# EAGLE board CT_schematic (EAGLE 7.6.0)

Size 100 x 80 mm. Coordinates in mm from the lower left corner, seen from the top.
Outline: 0,0 100,0 100,80 0,80 0,0
Copper layers (1*16): Top 0.035mm / dielectric 1.5mm / Bottom 0.035mm
Design rules "default": minimum track width 10mil, minimum drill 24mil, track to track 8mil, track to pad 8mil, pad to pad 8mil, via to via 8mil, smd to smd 8mil, copper to edge 40mil, drill to drill 8mil, minimum pad ring 10mil, minimum via ring 8mil, stop-mask expansion 4mil, vias tented up to drill 0mil, thermal gap 10mil

## Footprints (pad centres in the part's own frame; a part is rotated, then mirrored left to right if it is on the bottom)
C0603 = smd 0.8 x 0.8: 1 -0.762,0; 2 0.762,0
C0402 = smd 0.5 x 0.5: 1 -0.508,0; 2 0.508,0
C1206 = smd 1.3 x 1.6: 1 -1.524,0; 2 1.524,0
C0805 = smd 1.2 x 1.3: 1 -1.016,0; 2 1.016,0
C1210 = smd 1.2 x 2.5: 1 -1.524,0; 2 1.524,0
R0603 = smd 0.8 x 0.8: 1 -0.762,0; 2 0.762,0
EXV-9H = smd 3.505 x 1.676: 1 -2.857,0; 2 2.857,0
L0603 = smd 0.8 x 0.8: 1 -0.762,0; 2 0.762,0
PJ-037B_PACKAGE = drill 3.7 square: 1 12,0 | drill 3.2 square: 2 6,0
UFBGA176_25 = smd 0.3 x 0.3: A1 -4.55,4.55; A2 -3.9,4.55; A3 -3.25,4.55; A4 -2.6,4.55; A5 -1.95,4.55; A6 -1.3,4.55; A7 -0.65,4.55; A8 0,4.55; A9 0.65,4.55; A10 1.3,4.55; A11 1.95,4.55; A12 2.6,4.55; A13 3.25,4.55; A14 3.9,4.55; A15 4.55,4.55; B1 -4.55,3.9; B2 -3.9,3.9; B3 -3.25,3.9; B4 -2.6,3.9; B5 -1.95,3.9; B6 -1.3,3.9; B7 -0.65,3.9; B8 0,3.9; B9 0.65,3.9; B10 1.3,3.9; B11 1.95,3.9; B12 2.6,3.9; B13 3.25,3.9; B14 3.9,3.9; B15 4.55,3.9; C1 -4.55,3.25; C2 -3.9,3.25; C3 -3.25,3.25; C4 -2.6,3.25; C5 -1.95,3.25; C6 -1.3,3.25; C7 -0.65,3.25; C8 0,3.25; C9 0.65,3.25; C10 1.3,3.25; C11 1.95,3.25; C12 2.6,3.25; C13 3.25,3.25; C14 3.9,3.25; C15 4.55,3.25; D1 -4.55,2.6; D2 -3.9,2.6; D3 -3.25,2.6; D4 -2.6,2.6; D5 -1.95,2.6; D6 -1.3,2.6; D7 -0.65,2.6; D8 0,2.6; D9 0.65,2.6; D10 1.3,2.6; D11 1.95,2.6; D12 2.6,2.6; D13 3.25,2.6; D14 3.9,2.6; D15 4.55,2.6; E1 -4.55,1.95; E2 -3.9,1.95; E3 -3.25,1.95; E4 -2.6,1.95; E12 2.6,1.95; E13 3.25,1.95; E14 3.9,1.95; E15 4.55,1.95; F1 -4.55,1.3; F2 -3.9,1.3; F3 -3.25,1.3; F4 -2.6,1.3; F6 -1.3,1.3; F7 -0.65,1.3; F8 0,1.3; F9 0.65,1.3; F10 1.3,1.3; F12 2.6,1.3; F13 3.25,1.3; F14 3.9,1.3; F15 4.55,1.3; G1 -4.55,0.65; G2 -3.9,0.65; G3 -3.25,0.65; G4 -2.6,0.65; G6 -1.3,0.65; G7 -0.65,0.65; G8 0,0.65; G9 0.65,0.65; G10 1.3,0.65; G12 2.6,0.65; G13 3.25,0.65; G14 3.9,0.65; G15 4.55,0.65; H1 -4.55,0; H2 -3.9,0; H3 -3.25,0; H4 -2.6,0; H6 -1.3,0; H7 -0.65,0; H8 0,0; H9 0.65,0; H10 1.3,0; H12 2.6,0; H13 3.25,0; H14 3.9,0; H15 4.55,0; J1 -4.55,-0.65; J2 -3.9,-0.65; J3 -3.25,-0.65; J4 -2.6,-0.65; J6 -1.3,-0.65; J7 -0.65,-0.65; J8 0,-0.65; J9 0.65,-0.65; J10 1.3,-0.65; J12 2.6,-0.65; J13 3.25,-0.65; J14 3.9,-0.65; J15 4.55,-0.65; K1 -4.55,-1.3; K2 -3.9,-1.3; K3 -3.25,-1.3; K4 -2.6,-1.3; K6 -1.3,-1.3; K7 -0.65,-1.3; K8 0,-1.3; K9 0.65,-1.3; K10 1.3,-1.3; K12 2.6,-1.3; K13 3.25,-1.3; K14 3.9,-1.3; K15 4.55,-1.3; L1 -4.55,-1.95; L2 -3.9,-1.95; L3 -3.25,-1.95; L4 -2.6,-1.95; L12 2.6,-1.95; L13 3.25,-1.95; L14 3.9,-1.95; L15 4.55,-1.95; M1 -4.55,-2.6; M2 -3.9,-2.6; M3 -3.25,-2.6; M4 -2.6,-2.6; M5 -1.95,-2.6; M6 -1.3,-2.6; M7 -0.65,-2.6; M8 0,-2.6; M9 0.65,-2.6; M10 1.3,-2.6; M11 1.95,-2.6; M12 2.6,-2.6; M13 3.25,-2.6; M14 3.9,-2.6; M15 4.55,-2.6; N1 -4.55,-3.25; N2 -3.9,-3.25; N3 -3.25,-3.25; N4 -2.6,-3.25; N5 -1.95,-3.25; N6 -1.3,-3.25; N7 -0.65,-3.25; N8 0,-3.25; N9 0.65,-3.25; N10 1.3,-3.25; N11 1.95,-3.25; N12 2.6,-3.25; N13 3.25,-3.25; N14 3.9,-3.25; N15 4.55,-3.25; P1 -4.55,-3.9; P2 -3.9,-3.9; P3 -3.25,-3.9; P4 -2.6,-3.9; P5 -1.95,-3.9; P6 -1.3,-3.9; P7 -0.65,-3.9; P8 0,-3.9; P9 0.65,-3.9; P10 1.3,-3.9; P11 1.95,-3.9; P12 2.6,-3.9; P13 3.25,-3.9; P14 3.9,-3.9; P15 4.55,-3.9; R1 -4.55,-4.55; R2 -3.9,-4.55; R3 -3.25,-4.55; R4 -2.6,-4.55; R5 -1.95,-4.55; R6 -1.3,-4.55; R7 -0.65,-4.55; R8 0,-4.55; R9 0.65,-4.55; R10 1.3,-4.55; R11 1.95,-4.55; R12 2.6,-4.55; R13 3.25,-4.55; R14 3.9,-4.55; R15 4.55,-4.55
SOIC-8 = smd 1.6 x 0.6: 1 -2.7,1.905 | smd 1.55 x 0.6: 2 -2.7,0.635; 3 -2.7,-0.635; 4 -2.7,-1.905; 5 2.7,-1.905; 6 2.7,-0.635; 7 2.7,0.635; 8 2.7,1.905
RHB32_3P45X3P45 = smd 0.85 x 0.28: 1 -2.475,1.75; 2 -2.475,1.25; 3 -2.475,0.75; 4 -2.475,0.25; 5 -2.475,-0.25; 6 -2.475,-0.75; 7 -2.475,-1.25; 8 -2.475,-1.75; 17 2.475,-1.75; 18 2.475,-1.25; 19 2.475,-0.75; 20 2.475,-0.25; 21 2.475,0.25; 22 2.475,0.75; 23 2.475,1.25; 24 2.475,1.75 | smd 0.28 x 0.85: 9 -1.75,-2.475; 10 -1.25,-2.475; 11 -0.75,-2.475; 12 -0.25,-2.475; 13 0.25,-2.475; 14 0.75,-2.475; 15 1.25,-2.475; 16 1.75,-2.475; 25 1.75,2.475; 26 1.25,2.475; 27 0.75,2.475; 28 0.25,2.475; 29 -0.25,2.475; 30 -0.75,2.475; 31 -1.25,2.475; 32 -1.75,2.475 | smd 3.45 x 3.45: 33 0,0
FCI_10118193-0001LF = smd 0.4 x 1.35: 1 -1.3,2.675; 2 -0.65,2.675; 3 0,2.675; 4 0.65,2.675; 5 1.3,2.675 | smd 1.6 x 1.4: 6 -3.2,2.45; 7 3.2,2.45 | smd 1.9 x 1.9: 8 -1.2,0; 9 1.2,0 | hole 0.5: -3.3,0; 3.3,0
SOT143B = smd 1 x 0.7: 1 -0.75,-1 | smd 0.6 x 0.7: 2 0.95,-1; 3 0.95,1; 4 -0.95,1
ABS07-32.768KHZ-7-T = smd 1.1 x 2.4: 1 -2.5,0; 2 0,0
ABLS-25.000MHZ-B2F-T = smd 5.6 x 2.8: 1 -3.81,0; 2 5.69,0
ASFL1 = smd 1.7 x 1.5: 1 -1.27,-1.1; 2 1.27,-1.1; 3 1.27,1.1; 4 -1.27,1.1
WSON-8 = smd 0.3 x 0.6: 1 -0.75,0; 2 0.05,0; 3 0.85,0; 4 1.65,0; 5 1.65,3.8; 6 0.85,3.8; 7 0.05,3.8; 8 -0.75,3.8 | smd 3 x 2.6: PAD 0.45,1.9
QFN-38_UHF = smd 0.75 x 0.3: 1 -2.4,2.75; 2 -2.4,2.25; 3 -2.4,1.75; 4 -2.4,1.25; 6 -2.4,0.25; 7 -2.4,-0.25; 8 -2.4,-0.75; 9 -2.4,-1.25; 10 -2.4,-1.75; 11 -2.4,-2.25; 12 -2.4,-2.75; 20 2.4,-2.75; 21 2.4,-2.25; 22 2.4,-1.75; 23 2.4,-1.25; 24 2.4,-0.75; 25 2.4,-0.25; 26 2.4,0.25; 27 2.4,0.75; 28 2.4,1.25; 29 2.4,1.75; 30 2.4,2.25; 31 2.4,2.75 | smd 0.758 x 0.3: 5 -2.4,0.75 | smd 0.3 x 0.75: 13 -1.5,-3.4; 14 -1,-3.4; 15 -0.5,-3.4; 16 0,-3.4; 17 0.5,-3.4; 18 1,-3.4; 19 1.5,-3.4; 32 1.5,3.4; 33 1,3.4; 34 0.5,3.4; 35 0,3.4; 36 -0.5,3.4; 37 -1,3.4; 38 -1.5,3.4 | smd 3.2 x 5.2: 39 0,0
IRF8306MTRPBF = smd 0.9 x 1.85: 1 0,0; 2 0,-2.35; 6 6.4,0; 7 6.4,-2.35 | smd 0.75 x 0.75: 3 1.75,-1.175 | smd 1.45 x 0.87: 4 3.5,-0.565; 5 3.5,-1.785
SW_4-1437565-2 = smd 1.4 x 2.1: 1 -2.23,4.55; 2 -2.23,-4.55; 3 2.23,4.55; 4 2.23,-4.55
LGM67K-G1J2-24-Z = smd 0.8 x 1.4: A -2,0; C 0,0
NC7SZ125M5X = smd 1.3 x 0.7: 1 -1.3,0.95; 2 -1.3,0; 3 -1.3,-0.95; 4 1.3,-0.95; 5 1.3,0.95
DUMMY_PACKAGE_252 = drill 0.3: 1 0,-1; 2 1.5,-1

## Placement (x,y rotation side)
C1  1e-06  [C0603]  -30.48,71.12 0 top  (outside the outline)
C2  1e-07  [C0603]  -34.29,71.12 0 top  (outside the outline)
C3  1e-07  [C0603]  -38.1,71.12 0 top  (outside the outline)
C4  1e-07  [C0603]  -41.91,71.12 0 top  (outside the outline)
C5  1e-07  [C0603]  -45.72,71.12 0 top  (outside the outline)
C6  1e-07  [C0603]  -49.53,71.12 0 top  (outside the outline)
C7  1e-07  [C0603]  -53.34,71.12 0 top  (outside the outline)
C8  1e-07  [C0603]  -57.15,71.12 0 top  (outside the outline)
C9  1e-07  [C0603]  -60.96,71.12 0 top  (outside the outline)
C10  1e-07  [C0603]  -64.77,71.12 0 top  (outside the outline)
C11  1e-07  [C0603]  -68.58,71.12 0 top  (outside the outline)
C12  1e-07  [C0603]  -72.39,71.12 0 top  (outside the outline)
C13  1e-07  [C0603]  -76.2,71.12 0 top  (outside the outline)
C14  1e-07  [C0603]  -80.01,71.12 0 top  (outside the outline)
C15  1e-07  [C0603]  -15.24,76.2 0 top  (outside the outline)
C16  1e-07  [C0603]  -19.05,76.2 0 top  (outside the outline)
C17  4.7e-06  [C0603]  -15.24,71.12 0 top  (outside the outline)
C18  1e-08  [C0603]  -22.86,76.2 0 top  (outside the outline)
C19  1e-06  [C0603]  -26.67,76.2 0 top  (outside the outline)
C20  1e-07  [C0402]  -76.2,76.2 0 top  (outside the outline)
C21  1e-07  [C0402]  -80.01,76.2 0 top  (outside the outline)
C22  1e-11  [C0402]  -15.24,81.28 0 top  (outside the outline)
C23  1e-11  [C0402]  -19.05,81.28 0 top  (outside the outline)
C24  1e-11  [C0402]  -22.86,81.28 0 top  (outside the outline)
C25  1e-11  [C0402]  -26.67,81.28 0 top  (outside the outline)
C26  1e-08  [C0402]  -30.48,81.28 0 top  (outside the outline)
C27  1e-08  [C0402]  -34.29,81.28 0 top  (outside the outline)
C28  1e-07  [C0402]  -38.1,81.28 0 top  (outside the outline)
C29  2.2e-06  [C0603]  -19.05,71.12 0 top  (outside the outline)
C30  1e-07  [C0402]  -41.91,81.28 0 top  (outside the outline)
C31  1e-07  [C0402]  -45.72,81.28 0 top  (outside the outline)
C32  2.2e-06  [C0603]  -22.86,71.12 0 top  (outside the outline)
C33  1e-06  [C0603]  -30.48,76.2 0 top  (outside the outline)
C34  1e-08  [C0402]  -49.53,81.28 0 top  (outside the outline)
C35  1e-08  [C0402]  -53.34,81.28 0 top  (outside the outline)
C36  1e-05  [C1206]  -16.51,54.61 0 top  (outside the outline)
C37  1e-05  [C0805]  -46.99,54.61 0 top  (outside the outline)
C38  1e-08  [C0402]  -57.15,81.28 0 top  (outside the outline)
C39  1e-05  [C1206]  -22.86,54.61 0 top  (outside the outline)
C40  1e-05  [C0805]  -52.07,54.61 0 top  (outside the outline)
C41  1e-06  [C0603]  -34.29,76.2 0 top  (outside the outline)
C42  1e-05  [C1210]  -78.74,46.99 0 top  (outside the outline)
C43  1e-08  [C0402]  -60.96,81.28 0 top  (outside the outline)
C44  1e-05  [C1206]  -29.21,54.61 0 top  (outside the outline)
C45  1e-05  [C0805]  -57.15,54.61 0 top  (outside the outline)
C46  1e-07  [C0402]  -64.77,81.28 0 top  (outside the outline)
C47  2.2e-06  [C0603]  -26.67,71.12 0 top  (outside the outline)
C48  2.45e-08  [R0603]  -40.64,60.96 0 top  (outside the outline)
C49  2.8258362168397e-09  [R0603]  -67.31,54.61 0 top  (outside the outline)
C50  7.105e-09  [R0603]  -77.47,54.61 0 top  (outside the outline)
C51  0.0001  [EXV-9H]  -54.61,38.1 0 top  (outside the outline)
C52  0.0001  [EXV-9H]  -66.04,38.1 0 top  (outside the outline)
C53  1e-08  [C0402]  -68.58,81.28 0 top  (outside the outline)
C54  1e-08  [C0402]  -72.39,81.28 0 top  (outside the outline)
F1  240.0  [L0603]  -38.1,76.2 0 top  (outside the outline)
J1  PJ-037B  [PJ-037B_PACKAGE]  -41.91,7.62 0 top  (outside the outline)
R2  1000.0  [R0603]  -41.91,76.2 0 top  (outside the outline)
R7  4700.0  [R0603]  -45.72,76.2 0 top  (outside the outline)
R8  4700.0  [R0603]  -49.53,76.2 0 top  (outside the outline)
R9  10000.0  [R0603]  -45.72,60.96 0 top  (outside the outline)
R10  10000.0  [R0603]  -50.8,60.96 0 top  (outside the outline)
R11  10000.0  [R0603]  -55.88,60.96 0 top  (outside the outline)
R12  10000.0  [R0603]  -60.96,60.96 0 top  (outside the outline)
R13  10000.0  [R0603]  -66.04,60.96 0 top  (outside the outline)
R14  10000.0  [R0603]  -71.12,60.96 0 top  (outside the outline)
R15  10000.0  [R0603]  -76.2,60.96 0 top  (outside the outline)
R16  10000.0  [R0603]  -81.28,60.96 0 top  (outside the outline)
R17  10000.0  [R0603]  -15.24,66.04 0 top  (outside the outline)
R18  10000.0  [R0603]  -20.32,66.04 0 top  (outside the outline)
R19  10000.0  [R0603]  -25.4,66.04 0 top  (outside the outline)
R20  10000.0  [R0603]  -30.48,66.04 0 top  (outside the outline)
R21  100000.0  [R0603]  -15.24,60.96 0 top  (outside the outline)
R22  200.0  [R0603]  -53.34,76.2 0 top  (outside the outline)
R23  1000.0  [R0603]  -57.15,76.2 0 top  (outside the outline)
R24  100000.0  [R0603]  -20.32,60.96 0 top  (outside the outline)
R25  806.0  [R0603]  -60.96,76.2 0 top  (outside the outline)
R26  1000.0  [R0603]  -64.77,76.2 0 top  (outside the outline)
R27  100000.0  [R0603]  -25.4,60.96 0 top  (outside the outline)
R28  153694.38  [R0603]  -72.39,54.61 0 top  (outside the outline)
R29  100000.0  [R0603]  -30.48,60.96 0 top  (outside the outline)
R30  100000.0  [R0603]  -35.56,60.96 0 top  (outside the outline)
R31  200.0  [R0603]  -68.58,76.2 0 top  (outside the outline)
R32  1000.0  [R0603]  -72.39,76.2 0 top  (outside the outline)
R33  10000.0  [R0603]  -35.56,66.04 0 top  (outside the outline)
R34  75000.0  [R0603]  -40.64,66.04 0 top  (outside the outline)
R35  10000.0  [R0603]  -45.72,66.04 0 top  (outside the outline)
R36  10000.0  [R0603]  -50.8,66.04 0 top  (outside the outline)
R37  95300.0  [R0603]  -55.88,66.04 0 top  (outside the outline)
R38  95300.0  [R0603]  -60.96,66.04 0 top  (outside the outline)
R39  10000.0  [R0603]  -66.04,66.04 0 top  (outside the outline)
R40  10000.0  [R0603]  -71.12,66.04 0 top  (outside the outline)
R41  10000.0  [R0603]  -76.2,66.04 0 top  (outside the outline)
R42  62000.0  [R0603]  -81.28,66.04 0 top  (outside the outline)
U1  STM32F429IGH6  [UFBGA176_25]  -19.05,6.35 0 top  (outside the outline)
U2  AT25256B-SSHL-T  [SOIC-8]  -74.93,5.08 0 top  (outside the outline)
U3  AT25320B-SSHL-T  [SOIC-8]  -24.13,20.32 0 top  (outside the outline)
U4  TUSB1210BRHBR  [RHB32_3P45X3P45]  -38.1,48.26 0 top  (outside the outline)
U5  10118193-0001LF  [FCI_10118193-0001LF]  -35.56,38.1 0 top  (outside the outline)
U6  prtr5v0u2ax  [SOT143B]  -24.13,86.36 0 top  (outside the outline)
U7  ABS07-32.768KHZ-7-T  [ABS07-32.768KHZ-7-T]  -58.42,48.26 0 top  (outside the outline)
U8  ABLS-25.000MHZ-B2F-T  [ABLS-25.000MHZ-B2F-T]  -26.67,48.26 0 top  (outside the outline)
U9  ASFL1-26MHZ-NCS  [ASFL1]  -26.67,39.37 0 top  (outside the outline)
U10  LP3878SDX-ADJ/NOPB  [WSON-8]  -76.2,17.78 0 top  (outside the outline)
U11  LP3878SDX-ADJ/NOPB  [WSON-8]  -30.48,27.94 0 top  (outside the outline)
U12  LP2951ACSDX/NOPB  [WSON-8]  -68.58,27.94 0 top  (outside the outline)
U13  LP3878SDX-ADJ/NOPB  [WSON-8]  -50.8,27.94 0 top  (outside the outline)
U14  LTC2928CUHF#PBF  [QFN-38_UHF]  -44.45,38.1 0 top  (outside the outline)
U15  IRF8306MTRPbF  [IRF8306MTRPBF]  -41.91,20.32 0 top  (outside the outline)
U16  IRF8306MTRPbF  [IRF8306MTRPBF]  -57.15,20.32 0 top  (outside the outline)
U17  4-1437565-2  [SW_4-1437565-2]  -58.42,6.35 0 top  (outside the outline)
U18  Q65110A2395  [LGM67K-G1J2-24-Z]  -67.31,46.99 0 top  (outside the outline)
U19  nc7sz125m5x  [NC7SZ125M5X]  -34.29,54.61 0 top  (outside the outline)
U20  nc7sz125m5x  [NC7SZ125M5X]  -40.64,54.61 0 top  (outside the outline)
U21  Dummy  [DUMMY_PACKAGE_252]  -29.21,86.36 0 top  (outside the outline)

## Library data of the parts
C1-C54 F1 J1 R2 R7-R42 U1-U21 = circuit_tree

## Nets
CLK_CRYSTAL_U1_E1: C22.1 U1.E1 U7.1
CLK_CRYSTAL_U1_F1: C23.1 U1.F1 U7.2
CLK_CRYSTAL_U1_G1: C24.1 U1.G1 U8.1
CLK_CRYSTAL_U1_H1: C25.1 U1.H1 U8.2
CLK_U4_1: U4.1 U9.3
GND: C1.2 C2.2 C3.2 C4.2 C5.2 C6.2 C7.2 C8.2 C9.2 C10.2 C11.2 C12.2 C13.2 C14.2 C15.2 C16.2 C17.2 C18.2 C19.2 C20.2 C21.2 C22.2 C23.2 C24.2 C25.2 C26.2 C27.2 C28.2 C29.2 C30.2 C31.2 C32.2 C33.2 C34.2 C35.2 C36.2 C37.2 C38.2 C39.2 C40.2 C41.2 C42.2 C43.2 C44.2 C45.2 C46.2 C47.2 C48.2 C49.2 C50.2 C51.2 C52.2 C53.2 C54.2 J1.2 R2.2 R23.2 R26.2 R29.2 R32.2 R34.2 R37.2 R38.2 R39.2 R40.2 R41.2 U1.D5 U1.D7 U1.D8 U1.D9 U1.F2 U1.F6 U1.F7 U1.F8 U1.F9 U1.F10 U1.F12 U1.G2 U1.G6 U1.G7 U1.G8 U1.G9 U1.G10 U1.G12 U1.H6 U1.H7 U1.H8 U1.H9 U1.H10 U1.H12 U1.J6 U1.J7 U1.J8 U1.J9 U1.J10 U1.K6 U1.K7 U1.K8 U1.K9 U1.K10 U1.M1 U1.M8 U1.M9 U1.N1 U2.4 U3.4 U4.33 U5.5 U5.6 U5.7 U5.8 U5.9 U6.1 U9.2 U10.3 U10.PAD U11.3 U11.PAD U12.3 U12.4 U12.PAD U13.3 U13.PAD U14.8 U14.9 U14.10 U14.12 U14.13 U14.24 U14.25 U14.30 U14.32 U14.39 U18.C U19.1 U19.3 U20.1 U20.3 U21.1
NET_U1_C6: R9.1 U1.C6
NET_U1_D6: R10.1 U1.D6
NET_U1_F13: C21.1 U1.F13
NET_U1_J1: R7.1 U1.J1 U19.4
NET_U1_L4: R12.1 U1.L4
NET_U1_M6: R11.1 U1.M6
NET_U1_R1: C18.1 C19.1 F1.1 U1.P1 U1.R1
NET_U1_R14: U18.A
NET_U1_R15: U17.3 U17.4
NET_U2_3: R13.1 U2.3
NET_U2_7: R15.1 U2.7
NET_U3_3: R16.1 U3.3
NET_U3_7: R18.1 U3.7
NET_U4_11: R19.1 U4.11
NET_U4_12: C32.1 U4.12
NET_U4_14: R20.1 U4.14
NET_U4_20: C29.1 U4.20
NET_U4_27: R8.1 U4.27 U20.4
NET_U5_1: C33.1 U4.22 U5.1 U6.4
NET_U5_2: U4.19 U5.2 U6.3
NET_U5_3: U4.18 U5.3 U6.2
NET_U10_1: C35.1 U10.1
NET_U10_6: R22.2 R23.1 U10.6
NET_U10_8: R21.1 U10.8
NET_U11_1: C38.1 U11.1
NET_U11_6: R25.2 R26.1 U11.6
NET_U11_8: R24.1 U11.8
NET_U12_5: R27.1 U12.5
NET_U12_7: R28.2 R29.1 U12.7
NET_U13_1: C43.1 U13.1
NET_U13_6: R31.2 R32.1 U13.6
NET_U13_8: R30.1 U13.8
NET_U14_3: R40.1 U14.3
NET_U14_6: R37.1 U14.6
NET_U14_7: R38.1 U14.7
NET_U14_16: R39.1 R42.1 U14.16
NET_U14_18: R36.1 U14.18
NET_U14_19: R35.1 U14.19 U14.20
NET_U14_21: R33.1 R34.1 U14.21 U19.2 U20.2
NET_U14_22: C46.1 R33.2 R35.2 R36.2 U14.11 U14.22
NET_U14_26: C49.1 U14.26
NET_U14_27: C48.1 U14.27
NET_U14_28: C50.1 U14.28
NET_U14_38: R41.1 U14.38
NET_U15_3: U14.2 U15.3
NET_U16_3: U14.37 U16.3
NET_U17_1: R2.1 U17.1 U17.2
PROC_DAC_OUT1: U1.N4 U21.2
PROC_SPI1_MISO: U1.A9 U2.2
PROC_SPI1_MOSI: U1.R3 U2.5
PROC_SPI1_NSS: R14.1 U1.A13 U2.1
PROC_SPI1_SCK: U1.A10 U2.6
PROC_SPI2_MISO: U1.C14 U3.2
PROC_SPI2_MOSI: U1.C13 U3.5
PROC_SPI2_NSS: R17.1 U1.B4 U3.1
PROC_SPI2_SCK: U1.D11 U3.6
PROC_USB_OTG_HS_ULPI_CK: U1.P4 U4.26
PROC_USB_OTG_HS_ULPI_D0: U1.R2 U4.3
PROC_USB_OTG_HS_ULPI_D1: U1.R5 U4.4
PROC_USB_OTG_HS_ULPI_D2: U1.R4 U4.5
PROC_USB_OTG_HS_ULPI_D3: U1.R12 U4.6
PROC_USB_OTG_HS_ULPI_D4: U1.R13 U4.7
PROC_USB_OTG_HS_ULPI_D5: U1.P12 U4.9
PROC_USB_OTG_HS_ULPI_D6: U1.P13 U4.10
PROC_USB_OTG_HS_ULPI_D7: U1.A6 U4.13
PROC_USB_OTG_HS_ULPI_DIR: U1.E4 U4.31
PROC_USB_OTG_HS_ULPI_NXT: U1.H4 U4.2
PROC_USB_OTG_HS_ULPI_STP: U1.M2 U4.29
VCC_7V8: C47.1 C51.1 C52.1 J1.1 R42.2 U14.23 U15.1 U15.2 U15.6 U15.7 U16.1 U16.2 U16.6 U16.7
VCC_S1_7V8: C36.1 C39.1 C41.1 R21.2 R24.2 U10.4 U11.4 U12.8 U15.4 U15.5
VCC_S2_7V8: C44.1 R30.2 U13.4 U16.4 U16.5
VCC_TIER1_1V2: C20.1 C37.1 R22.1 U1.M10 U10.5
VCC_TIER1_1V8: C1.1 C2.1 C3.1 C4.1 C5.1 C6.1 C7.1 C8.1 C9.1 C10.1 C11.1 C12.1 C13.1 C14.1 C15.1 C16.1 C17.1 C26.1 C27.1 C30.1 C31.1 C40.1 C53.1 C54.1 F1.2 R7.2 R8.2 R9.2 R10.2 R11.2 R12.2 R13.2 R14.2 R15.2 R16.2 R17.2 R18.2 R19.2 R20.2 R25.1 U1.C1 U1.C5 U1.C7 U1.C8 U1.C9 U1.F3 U1.G3 U1.G13 U1.H13 U1.J12 U1.J13 U1.K4 U1.N8 U1.N9 U1.N10 U2.8 U3.8 U4.28 U4.30 U4.32 U11.5 U19.5 U20.5
VCC_TIER1_3V3: C28.1 C34.1 C42.1 R27.2 R28.1 U4.21 U9.4 U12.1
VCC_TIER2_1V2: C45.1 R31.1 U13.5

## Tracks (layer width: path | path; a pad name or v marks a point on that pad's centre or on a via)
CLK_CRYSTAL_U1_E1  (2 unrouted)
CLK_CRYSTAL_U1_F1  (2 unrouted)
CLK_CRYSTAL_U1_G1  (2 unrouted)
CLK_CRYSTAL_U1_H1  (2 unrouted)
CLK_U4_1  (1 unrouted)
GND  (138 unrouted)
NET_U1_C6  (1 unrouted)
NET_U1_D6  (1 unrouted)
NET_U1_F13  (1 unrouted)
NET_U1_J1  (2 unrouted)
NET_U1_L4  (1 unrouted)
NET_U1_M6  (1 unrouted)
NET_U1_R1  (4 unrouted)
NET_U1_R15  (1 unrouted)
NET_U2_3  (1 unrouted)
NET_U2_7  (1 unrouted)
NET_U3_3  (1 unrouted)
NET_U3_7  (1 unrouted)
NET_U4_11  (1 unrouted)
NET_U4_12  (1 unrouted)
NET_U4_14  (1 unrouted)
NET_U4_20  (1 unrouted)
NET_U4_27  (2 unrouted)
NET_U5_1  (3 unrouted)
NET_U5_2  (2 unrouted)
NET_U5_3  (2 unrouted)
NET_U10_1  (1 unrouted)
NET_U10_6  (2 unrouted)
NET_U10_8  (1 unrouted)
NET_U11_1  (1 unrouted)
NET_U11_6  (2 unrouted)
NET_U11_8  (1 unrouted)
NET_U12_5  (1 unrouted)
NET_U12_7  (2 unrouted)
NET_U13_1  (1 unrouted)
NET_U13_6  (2 unrouted)
NET_U13_8  (1 unrouted)
NET_U14_3  (1 unrouted)
NET_U14_6  (1 unrouted)
NET_U14_7  (1 unrouted)
NET_U14_16  (2 unrouted)
NET_U14_18  (1 unrouted)
NET_U14_19  (2 unrouted)
NET_U14_21  (4 unrouted)
NET_U14_22  (5 unrouted)
NET_U14_26  (1 unrouted)
NET_U14_27  (1 unrouted)
NET_U14_28  (1 unrouted)
NET_U14_38  (1 unrouted)
NET_U15_3  (1 unrouted)
NET_U16_3  (1 unrouted)
NET_U17_1  (2 unrouted)
PROC_DAC_OUT1  (1 unrouted)
PROC_SPI1_MISO  (1 unrouted)
PROC_SPI1_MOSI  (1 unrouted)
PROC_SPI1_NSS  (2 unrouted)
PROC_SPI1_SCK  (1 unrouted)
PROC_SPI2_MISO  (1 unrouted)
PROC_SPI2_MOSI  (1 unrouted)
PROC_SPI2_NSS  (2 unrouted)
PROC_SPI2_SCK  (1 unrouted)
PROC_USB_OTG_HS_ULPI_CK  (1 unrouted)
PROC_USB_OTG_HS_ULPI_D0  (1 unrouted)
PROC_USB_OTG_HS_ULPI_D1  (1 unrouted)
PROC_USB_OTG_HS_ULPI_D2  (1 unrouted)
PROC_USB_OTG_HS_ULPI_D3  (1 unrouted)
PROC_USB_OTG_HS_ULPI_D4  (1 unrouted)
PROC_USB_OTG_HS_ULPI_D5  (1 unrouted)
PROC_USB_OTG_HS_ULPI_D6  (1 unrouted)
PROC_USB_OTG_HS_ULPI_D7  (1 unrouted)
PROC_USB_OTG_HS_ULPI_DIR  (1 unrouted)
PROC_USB_OTG_HS_ULPI_NXT  (1 unrouted)
PROC_USB_OTG_HS_ULPI_STP  (1 unrouted)
VCC_7V8  (13 unrouted)
VCC_S1_7V8  (9 unrouted)
VCC_S2_7V8  (4 unrouted)
VCC_TIER1_1V2  (4 unrouted)
VCC_TIER1_1V8  (62 unrouted)
VCC_TIER1_3V3  (7 unrouted)
VCC_TIER2_1V2  (2 unrouted)